# EAGLE board 12003-ZX_Gesture_Sensor_SMD-panel-.v10 (EAGLE 7.5.0), part 1 of 5
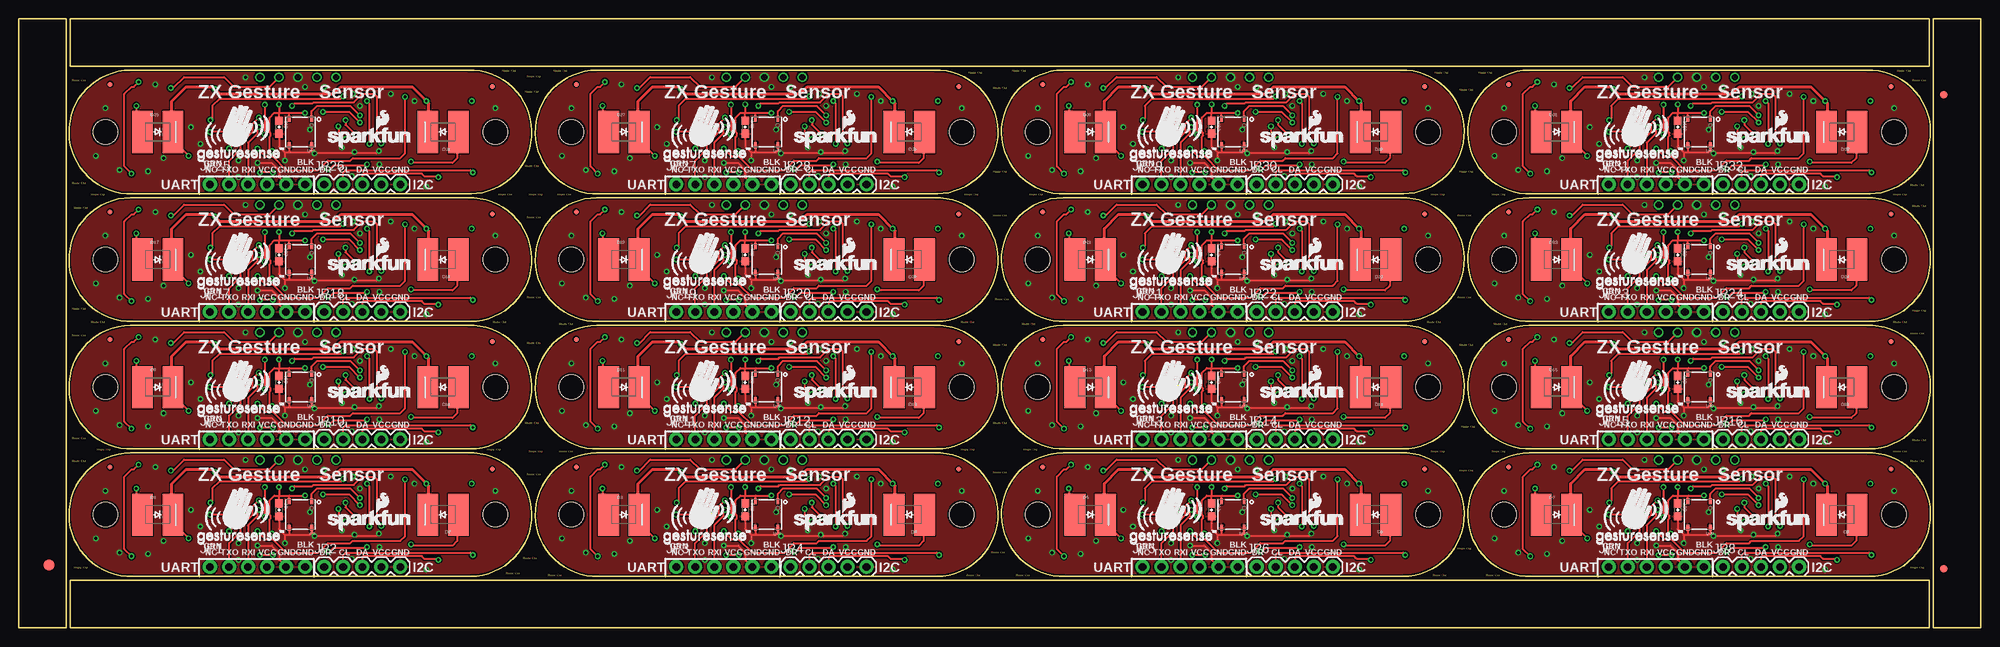
[diagram p0: board, top side]
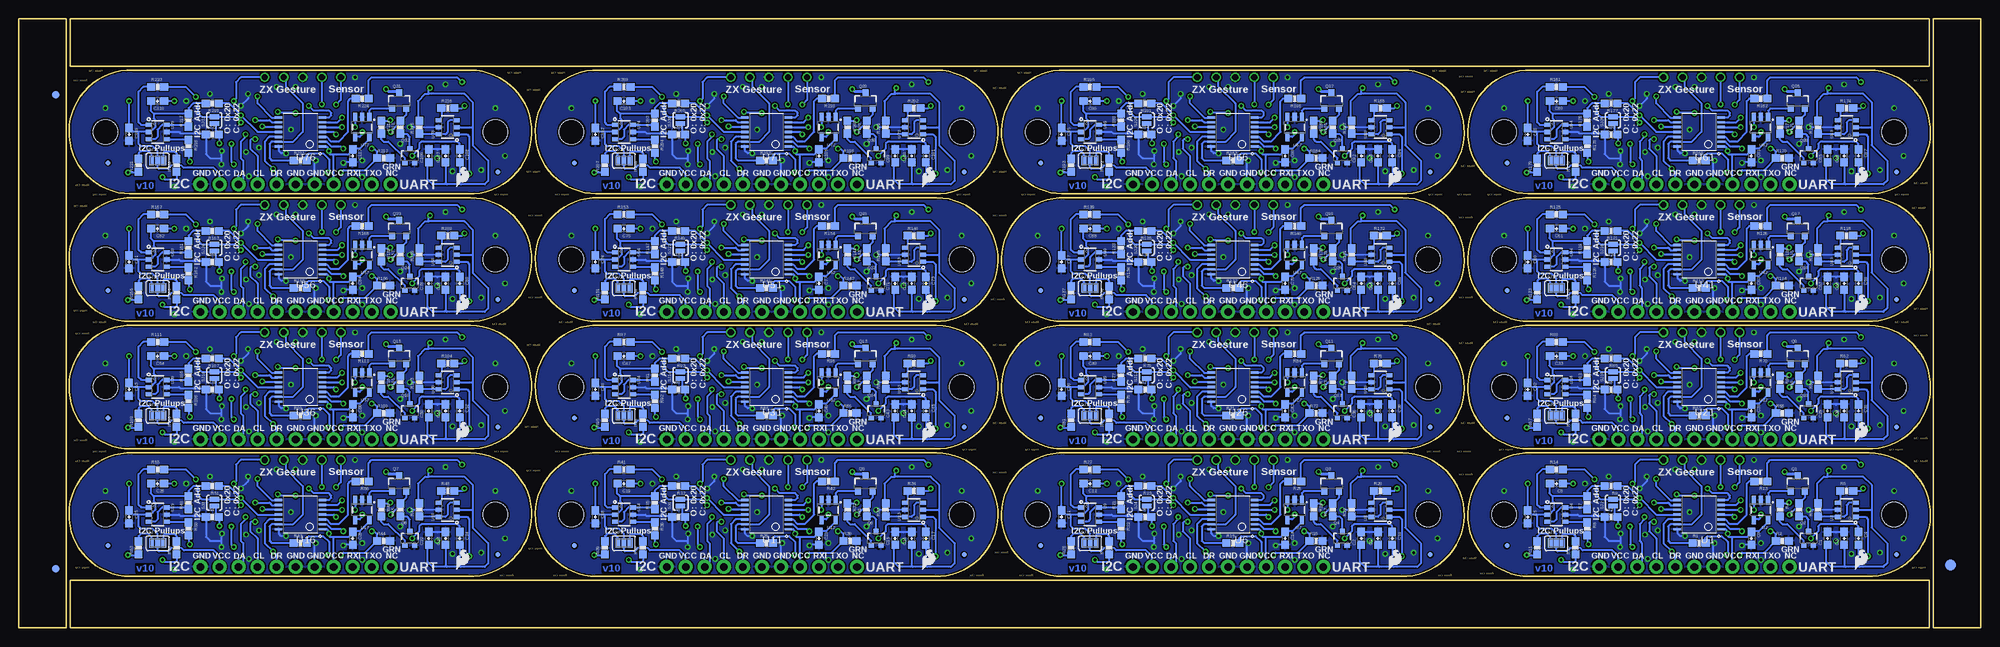
[diagram p1: board, bottom side, seen from below]

Size 261.87 x 81.28 mm. Coordinates in mm from the lower left corner, seen from the top.
Outline: 60.29,6.86 15.21,6.86 arc-181 14.89,23.37 59.98,23.37 arc-181 60.29,6.86
Outline: 60.29,6.86 60.45,6.86
Outline: 122.52,6.86 77.44,6.86 arc-181 77.12,23.37 122.21,23.37 arc-181 122.52,6.86
Outline: 122.52,6.86 122.68,6.86
Outline: 184.75,6.86 139.67,6.86 arc-181 139.35,23.37 184.44,23.37 arc-181 184.75,6.86
Outline: 184.75,6.86 184.91,6.86
Outline: 246.98,6.86 201.9,6.86 arc-181 201.58,23.37 246.67,23.37 arc-181 246.98,6.86
Outline: 246.98,6.86 247.14,6.86
Outline: 60.29,23.88 15.21,23.88 arc-181 14.89,40.39 59.98,40.39 arc-181 60.29,23.88
Outline: 60.29,23.88 60.45,23.88
Outline: 122.52,23.88 77.44,23.88 arc-181 77.12,40.39 122.21,40.39 arc-181 122.52,23.88
Outline: 122.52,23.88 122.68,23.88
Outline: 184.75,23.88 139.67,23.88 arc-181 139.35,40.39 184.44,40.39 arc-181 184.75,23.88
Outline: 184.75,23.88 184.91,23.88
Outline: 246.98,23.88 201.9,23.88 arc-181 201.58,40.39 246.67,40.39 arc-181 246.98,23.88
Outline: 246.98,23.88 247.14,23.88
Outline: 60.29,40.89 15.21,40.89 arc-181 14.89,57.4 59.98,57.4 arc-181 60.29,40.89
Outline: 60.29,40.89 60.45,40.89
Outline: 122.52,40.89 77.44,40.89 arc-181 77.12,57.4 122.21,57.4 arc-181 122.52,40.89
Outline: 122.52,40.89 122.68,40.89
Outline: 184.75,40.89 139.67,40.89 arc-181 139.35,57.4 184.44,57.4 arc-181 184.75,40.89
Outline: 184.75,40.89 184.91,40.89
Outline: 246.98,40.89 201.9,40.89 arc-181 201.58,57.4 246.67,57.4 arc-181 246.98,40.89
Outline: 246.98,40.89 247.14,40.89
Outline: 60.29,57.91 15.21,57.91 arc-181 14.89,74.42 59.98,74.42 arc-181 60.29,57.91
Outline: 60.29,57.91 60.45,57.91
Outline: 122.52,57.91 77.44,57.91 arc-181 77.12,74.42 122.21,74.42 arc-181 122.52,57.91
Outline: 122.52,57.91 122.68,57.91
Outline: 184.75,57.91 139.67,57.91 arc-181 139.35,74.42 184.44,74.42 arc-181 184.75,57.91
Outline: 184.75,57.91 184.91,57.91
Outline: 246.98,57.91 201.9,57.91 arc-181 201.58,74.42 246.67,74.42 arc-181 246.98,57.91
Outline: 246.98,57.91 247.14,57.91
Outline: 0,29.72 0,0 6.35,0 6.35,81.28 0,81.28 0,27.18
Outline: 79.25,0 6.86,0 6.86,6.35 29.72,6.35
Outline: 27.18,6.35 255.02,6.35 255.02,0 76.71,0
Outline: 182.37,81.28 255.02,81.28 255.02,74.93 231.9,74.93
Outline: 234.44,74.93 6.86,74.93 6.86,81.28 184.91,81.28
Outline: 261.87,52.32 261.87,81.28 255.52,81.28 255.52,0 261.87,0 261.87,54.86
Copper layers (1*16): Top 0.035mm / dielectric 1.5mm / Bottom 0.035mm
Design rules "SparkFun-2-layer-TIGHT": minimum track width 7mil, minimum drill 15mil, track to track 7mil, track to pad 7mil, pad to pad 7mil, via to via 7mil, smd to smd 7mil, copper to edge 7mil, drill to drill 7mil, minimum pad ring 7mil, minimum via ring 7mil, stop-mask expansion 4mil, vias tented up to drill 20mil, thermal gap 10mil

## Footprints (pad centres in the part's own frame; a part is rotated, then mirrored left to right if it is on the bottom)
0603-CAP = smd 1.1 x 1: 1 -0.85,0; 2 0.85,0
SFH4641-SHORT2 = smd 5.62 x 2.77: A 0,-2.035; C 0,2.035
FIDUCIAL-1.5X3 = smd 1.5 x 1.5: 1 0,0
FIDUCIAL-1X2 = smd 1 x 1: 1 0,0
MICRO-FIDUCIAL = smd 0.635 x 0.635: 1 0,0
1X06_NO_SILK = drill 1.016 pad 1.88: 1 0,0; 2 2.54,0; 3 5.08,0; 4 7.62,0; 5 10.16,0; 6 12.7,0
1X05 = drill 1.016 pad 1.88: 1 0,0; 2 2.54,0; 3 5.08,0; 4 7.62,0; 5 10.16,0
SOT23-3 = smd 0.8 x 0.9: 1 -0.95,-1; 2 0.95,-1; 3 0,1.1
SOT323 = smd 0.7 x 0.7: 1 -0.65,-0.925; 2 0.65,-0.925; 3 0,0.925
0603-RES = smd 1.1 x 1: 1 -0.85,0; 2 0.85,0
PAD-JUMPER-3-NC_BY_PASTE_YES_SILK_FULL_BOX = smd 0.635 x 1.27: 1 -0.813,0; 2 0,0; 3 0.813,0
PAD-JUMPER-2-NO_YES_SILK = smd 0.635 x 1.27: 1 -0.45,0; 2 0.45,0
STAND-OFF = hole 3.302: 0,0
PAD.03X.04 = smd 1.016 x 1.016: P$1 0,0
TSSOP14 = smd 0.305 x 0.991: 1 -1.95,-2.918; 2 -1.3,-2.918; 3 -0.65,-2.918; 4 0,-2.918; 5 0.65,-2.918; 6 1.3,-2.918; 7 1.95,-2.918; 8 1.95,2.918; 9 1.3,2.918; 10 0.65,2.918; 11 0,2.918; 12 -0.65,2.918; 13 -1.3,2.918; 14 -1.95,2.918
SOT23-5 = smd 0.55 x 1.2: 1 -0.95,-1.3; 2 0,-1.3; 3 0.95,-1.3; 4 0.95,1.3; 5 -0.95,1.3
SOT26 = smd 0.55 x 0.8: D1 -0.95,1.2; D2 0.95,1.2; G1 -0.95,-1.2; G2 0.95,-1.2; S1 0,1.2; S2 0,-1.2
TSOP572 = smd 0.35 x 0.8: 1 -1.5,-1.775; 5 1.5,-1.775; 6 1.5,1.775; 8 -1.5,1.775

## Placement (x,y rotation side)
C1  0.1uF  [0603-CAP]  20.45,11.94 90 bottom
C2  0.1uF  [0603-CAP]  82.68,11.94 90 bottom
C3  0.1uF  [0603-CAP]  18.22,11.94 90 bottom
C4  10nF  [0603-CAP]  16.32,11.94 270 bottom
C5  0.1uF  [0603-CAP]  60.45,14.8 270 bottom
C6  10nF  [0603-CAP]  56.64,19.24 180 bottom
C7  4.7uF  [0603-CAP]  34.73,15.75 270 top
C8  0.1uF  [0603-CAP]  30.61,11.94 270 bottom
C9  0.1uF  [0603-CAP]  80.45,11.94 90 bottom
C10  10nF  [0603-CAP]  78.55,11.94 270 bottom
C11  0.1uF  [0603-CAP]  122.68,14.8 270 bottom
C12  10nF  [0603-CAP]  118.87,19.24 180 bottom
C13  4.7uF  [0603-CAP]  96.96,15.75 270 top
C14  0.1uF  [0603-CAP]  92.84,11.94 270 bottom
C15  0.1uF  [0603-CAP]  144.91,11.94 90 bottom
C16  0.1uF  [0603-CAP]  142.68,11.94 90 bottom
C17  10nF  [0603-CAP]  140.78,11.94 270 bottom
C18  0.1uF  [0603-CAP]  184.91,14.8 270 bottom
C19  10nF  [0603-CAP]  181.1,19.24 180 bottom
C20  4.7uF  [0603-CAP]  159.19,15.75 270 top
C21  0.1uF  [0603-CAP]  155.07,11.94 270 bottom
C22  0.1uF  [0603-CAP]  207.14,11.94 90 bottom
C23  0.1uF  [0603-CAP]  204.91,11.94 90 bottom
C24  10nF  [0603-CAP]  203.01,11.94 270 bottom
C25  0.1uF  [0603-CAP]  247.14,14.8 270 bottom
C26  10nF  [0603-CAP]  243.33,19.24 180 bottom
C27  4.7uF  [0603-CAP]  221.42,15.75 270 top
C28  0.1uF  [0603-CAP]  217.3,11.94 270 bottom
C29  0.1uF  [0603-CAP]  20.45,28.96 90 bottom
C30  0.1uF  [0603-CAP]  18.22,28.96 90 bottom
C31  10nF  [0603-CAP]  16.32,28.96 270 bottom
C32  0.1uF  [0603-CAP]  60.45,31.81 270 bottom
C33  10nF  [0603-CAP]  56.64,36.26 180 bottom
C34  4.7uF  [0603-CAP]  34.73,32.77 270 top
C35  0.1uF  [0603-CAP]  30.61,28.96 270 bottom
C36  0.1uF  [0603-CAP]  82.68,28.96 90 bottom
C37  0.1uF  [0603-CAP]  80.45,28.96 90 bottom
C38  10nF  [0603-CAP]  78.55,28.96 270 bottom
C39  0.1uF  [0603-CAP]  122.68,31.81 270 bottom
C40  10nF  [0603-CAP]  118.87,36.26 180 bottom
C41  4.7uF  [0603-CAP]  96.96,32.77 270 top
C42  0.1uF  [0603-CAP]  92.84,28.96 270 bottom
C43  0.1uF  [0603-CAP]  144.91,28.96 90 bottom
C44  0.1uF  [0603-CAP]  142.68,28.96 90 bottom
C45  10nF  [0603-CAP]  140.78,28.96 270 bottom
C46  0.1uF  [0603-CAP]  184.91,31.81 270 bottom
C47  10nF  [0603-CAP]  181.1,36.26 180 bottom
C48  4.7uF  [0603-CAP]  159.19,32.77 270 top
C49  0.1uF  [0603-CAP]  155.07,28.96 270 bottom
C50  0.1uF  [0603-CAP]  207.14,28.96 90 bottom
C51  0.1uF  [0603-CAP]  204.91,28.96 90 bottom
C52  10nF  [0603-CAP]  203.01,28.96 270 bottom
C53  0.1uF  [0603-CAP]  247.14,31.81 270 bottom
C54  10nF  [0603-CAP]  243.33,36.26 180 bottom
C55  4.7uF  [0603-CAP]  221.42,32.77 270 top
C56  0.1uF  [0603-CAP]  217.3,28.96 270 bottom
C57  0.1uF  [0603-CAP]  20.45,45.97 90 bottom
C58  0.1uF  [0603-CAP]  18.22,45.97 90 bottom
C59  10nF  [0603-CAP]  16.32,45.97 270 bottom
C60  0.1uF  [0603-CAP]  60.45,48.83 270 bottom
C61  10nF  [0603-CAP]  56.64,53.28 180 bottom
C62  4.7uF  [0603-CAP]  34.73,49.78 270 top
C63  0.1uF  [0603-CAP]  30.61,45.97 270 bottom
C64  0.1uF  [0603-CAP]  82.68,45.97 90 bottom
C65  0.1uF  [0603-CAP]  80.45,45.97 90 bottom
C66  10nF  [0603-CAP]  78.55,45.97 270 bottom
C67  0.1uF  [0603-CAP]  122.68,48.83 270 bottom
C68  10nF  [0603-CAP]  118.87,53.28 180 bottom
C69  4.7uF  [0603-CAP]  96.96,49.78 270 top
C70  0.1uF  [0603-CAP]  92.84,45.97 270 bottom
C71  0.1uF  [0603-CAP]  144.91,45.97 90 bottom
C72  0.1uF  [0603-CAP]  142.68,45.97 90 bottom
C73  10nF  [0603-CAP]  140.78,45.97 270 bottom
C74  0.1uF  [0603-CAP]  184.91,48.83 270 bottom
C75  10nF  [0603-CAP]  181.1,53.28 180 bottom
C76  4.7uF  [0603-CAP]  159.19,49.78 270 top
C77  0.1uF  [0603-CAP]  155.07,45.97 270 bottom
C78  0.1uF  [0603-CAP]  207.14,45.97 90 bottom
C79  0.1uF  [0603-CAP]  204.91,45.97 90 bottom
C80  10nF  [0603-CAP]  203.01,45.97 270 bottom
C81  0.1uF  [0603-CAP]  247.14,48.83 270 bottom
C82  10nF  [0603-CAP]  243.33,53.28 180 bottom
C83  4.7uF  [0603-CAP]  221.42,49.78 270 top
C84  0.1uF  [0603-CAP]  217.3,45.97 270 bottom
C85  0.1uF  [0603-CAP]  20.45,62.99 90 bottom
C86  0.1uF  [0603-CAP]  18.22,62.99 90 bottom
C87  10nF  [0603-CAP]  16.32,62.99 270 bottom
C88  0.1uF  [0603-CAP]  60.45,65.85 270 bottom
C89  10nF  [0603-CAP]  56.64,70.29 180 bottom
C90  4.7uF  [0603-CAP]  34.73,66.8 270 top
C91  0.1uF  [0603-CAP]  30.61,62.99 270 bottom
C92  0.1uF  [0603-CAP]  82.68,62.99 90 bottom
C93  0.1uF  [0603-CAP]  80.45,62.99 90 bottom
C94  10nF  [0603-CAP]  78.55,62.99 270 bottom
C95  0.1uF  [0603-CAP]  122.68,65.85 270 bottom
C96  10nF  [0603-CAP]  118.87,70.29 180 bottom
C97  4.7uF  [0603-CAP]  96.96,66.8 270 top
C98  0.1uF  [0603-CAP]  92.84,62.99 270 bottom
C99  0.1uF  [0603-CAP]  144.91,62.99 90 bottom
C100  0.1uF  [0603-CAP]  142.68,62.99 90 bottom
C101  10nF  [0603-CAP]  140.78,62.99 270 bottom
C102  0.1uF  [0603-CAP]  184.91,65.85 270 bottom
C103  10nF  [0603-CAP]  181.1,70.29 180 bottom
C104  4.7uF  [0603-CAP]  159.19,66.8 270 top
C105  0.1uF  [0603-CAP]  155.07,62.99 270 bottom
C106  0.1uF  [0603-CAP]  207.14,62.99 90 bottom
C107  0.1uF  [0603-CAP]  204.91,62.99 90 bottom
C108  10nF  [0603-CAP]  203.01,62.99 270 bottom
C109  0.1uF  [0603-CAP]  247.14,65.85 270 bottom
C110  10nF  [0603-CAP]  243.33,70.29 180 bottom
C111  4.7uF  [0603-CAP]  221.42,66.8 270 top
C112  0.1uF  [0603-CAP]  217.3,62.99 270 bottom
D1  SFH4641SHORT2  [SFH4641-SHORT2]  18.54,15.11 270 top
D2  SFH4641SHORT2  [SFH4641-SHORT2]  56.64,15.11 90 top
D3  SFH4641SHORT2  [SFH4641-SHORT2]  80.77,15.11 270 top
D4  SFH4641SHORT2  [SFH4641-SHORT2]  118.87,15.11 90 top
D5  SFH4641SHORT2  [SFH4641-SHORT2]  143,15.11 270 top
D6  SFH4641SHORT2  [SFH4641-SHORT2]  181.1,15.11 90 top
D7  SFH4641SHORT2  [SFH4641-SHORT2]  205.23,15.11 270 top
D8  SFH4641SHORT2  [SFH4641-SHORT2]  243.33,15.11 90 top
D9  SFH4641SHORT2  [SFH4641-SHORT2]  18.54,32.13 270 top
D10  SFH4641SHORT2  [SFH4641-SHORT2]  56.64,32.13 90 top
D11  SFH4641SHORT2  [SFH4641-SHORT2]  80.77,32.13 270 top
D12  SFH4641SHORT2  [SFH4641-SHORT2]  118.87,32.13 90 top
D13  SFH4641SHORT2  [SFH4641-SHORT2]  143,32.13 270 top
D14  SFH4641SHORT2  [SFH4641-SHORT2]  181.1,32.13 90 top
D15  SFH4641SHORT2  [SFH4641-SHORT2]  205.23,32.13 270 top
D16  SFH4641SHORT2  [SFH4641-SHORT2]  243.33,32.13 90 top
D17  SFH4641SHORT2  [SFH4641-SHORT2]  18.54,49.15 270 top
D18  SFH4641SHORT2  [SFH4641-SHORT2]  56.64,49.15 90 top
D19  SFH4641SHORT2  [SFH4641-SHORT2]  80.77,49.15 270 top
D20  SFH4641SHORT2  [SFH4641-SHORT2]  118.87,49.15 90 top
D21  SFH4641SHORT2  [SFH4641-SHORT2]  143,49.15 270 top
D22  SFH4641SHORT2  [SFH4641-SHORT2]  181.1,49.15 90 top
D23  SFH4641SHORT2  [SFH4641-SHORT2]  205.23,49.15 270 top
D24  SFH4641SHORT2  [SFH4641-SHORT2]  243.33,49.15 90 top
D25  SFH4641SHORT2  [SFH4641-SHORT2]  18.54,66.17 270 top
D26  SFH4641SHORT2  [SFH4641-SHORT2]  56.64,66.17 90 top
D27  SFH4641SHORT2  [SFH4641-SHORT2]  80.77,66.17 270 top
D28  SFH4641SHORT2  [SFH4641-SHORT2]  118.87,66.17 90 top
D29  SFH4641SHORT2  [SFH4641-SHORT2]  143,66.17 270 top
D30  SFH4641SHORT2  [SFH4641-SHORT2]  181.1,66.17 90 top
D31  SFH4641SHORT2  [SFH4641-SHORT2]  205.23,66.17 270 top
D32  SFH4641SHORT2  [SFH4641-SHORT2]  243.33,66.17 90 top
E$1  [FIDUCIAL-1.5X3]  4.06,8.38 0 top
E$2  [FIDUCIAL-1.5X3]  4.06,8.38 90 bottom
E$3  [FIDUCIAL-1X2]  256.92,7.87 0 bottom
E$4  [FIDUCIAL-1X2]  256.92,71.12 0 bottom
E$7  [FIDUCIAL-1X2]  256.92,71.12 180 top
E$8  [FIDUCIAL-1X2]  256.92,7.87 0 top
FID1  FIDUCIALUFIDUCIAL  [MICRO-FIDUCIAL]  11.24,9.78 0 bottom
FID2  FIDUCIALUFIDUCIAL  [MICRO-FIDUCIAL]  63.25,10.99 0 bottom
FID3  FIDUCIALUFIDUCIAL  [MICRO-FIDUCIAL]  12.19,21.46 0 top
FID4  FIDUCIALUFIDUCIAL  [MICRO-FIDUCIAL]  63.21,21.18 0 top
FID5  FIDUCIALUFIDUCIAL  [MICRO-FIDUCIAL]  73.47,9.78 0 bottom
FID6  FIDUCIALUFIDUCIAL  [MICRO-FIDUCIAL]  125.48,10.99 0 bottom
FID7  FIDUCIALUFIDUCIAL  [MICRO-FIDUCIAL]  125.44,21.18 0 top
FID8  FIDUCIALUFIDUCIAL  [MICRO-FIDUCIAL]  74.42,21.46 0 top
FID9  FIDUCIALUFIDUCIAL  [MICRO-FIDUCIAL]  135.7,9.78 0 bottom
FID10  FIDUCIALUFIDUCIAL  [MICRO-FIDUCIAL]  187.71,10.99 0 bottom
FID11  FIDUCIALUFIDUCIAL  [MICRO-FIDUCIAL]  187.67,21.18 0 top
FID12  FIDUCIALUFIDUCIAL  [MICRO-FIDUCIAL]  136.65,21.46 0 top
FID13  FIDUCIALUFIDUCIAL  [MICRO-FIDUCIAL]  197.93,9.78 0 bottom
FID14  FIDUCIALUFIDUCIAL  [MICRO-FIDUCIAL]  249.94,10.99 0 bottom
FID15  FIDUCIALUFIDUCIAL  [MICRO-FIDUCIAL]  249.9,21.18 0 top
FID16  FIDUCIALUFIDUCIAL  [MICRO-FIDUCIAL]  198.88,21.46 0 top
FID17  FIDUCIALUFIDUCIAL  [MICRO-FIDUCIAL]  11.24,26.8 0 bottom
FID18  FIDUCIALUFIDUCIAL  [MICRO-FIDUCIAL]  63.25,28 0 bottom
FID19  FIDUCIALUFIDUCIAL  [MICRO-FIDUCIAL]  63.21,38.2 0 top
FID20  FIDUCIALUFIDUCIAL  [MICRO-FIDUCIAL]  12.19,38.48 0 top
FID21  FIDUCIALUFIDUCIAL  [MICRO-FIDUCIAL]  73.47,26.8 0 bottom
FID22  FIDUCIALUFIDUCIAL  [MICRO-FIDUCIAL]  125.48,28 0 bottom
FID23  FIDUCIALUFIDUCIAL  [MICRO-FIDUCIAL]  125.44,38.2 0 top
FID24  FIDUCIALUFIDUCIAL  [MICRO-FIDUCIAL]  74.42,38.48 0 top
FID25  FIDUCIALUFIDUCIAL  [MICRO-FIDUCIAL]  135.7,26.8 0 bottom
FID26  FIDUCIALUFIDUCIAL  [MICRO-FIDUCIAL]  187.71,28 0 bottom
FID27  FIDUCIALUFIDUCIAL  [MICRO-FIDUCIAL]  187.67,38.2 0 top
FID28  FIDUCIALUFIDUCIAL  [MICRO-FIDUCIAL]  136.65,38.48 0 top
FID29  FIDUCIALUFIDUCIAL  [MICRO-FIDUCIAL]  197.93,26.8 0 bottom
FID30  FIDUCIALUFIDUCIAL  [MICRO-FIDUCIAL]  249.94,28 0 bottom
FID31  FIDUCIALUFIDUCIAL  [MICRO-FIDUCIAL]  249.9,38.2 0 top
FID32  FIDUCIALUFIDUCIAL  [MICRO-FIDUCIAL]  198.88,38.48 0 top
FID33  FIDUCIALUFIDUCIAL  [MICRO-FIDUCIAL]  11.24,43.81 0 bottom
FID34  FIDUCIALUFIDUCIAL  [MICRO-FIDUCIAL]  63.25,45.02 0 bottom
FID35  FIDUCIALUFIDUCIAL  [MICRO-FIDUCIAL]  63.21,55.21 0 top
FID36  FIDUCIALUFIDUCIAL  [MICRO-FIDUCIAL]  12.19,55.5 0 top
FID37  FIDUCIALUFIDUCIAL  [MICRO-FIDUCIAL]  73.47,43.81 0 bottom
FID38  FIDUCIALUFIDUCIAL  [MICRO-FIDUCIAL]  125.48,45.02 0 bottom
FID39  FIDUCIALUFIDUCIAL  [MICRO-FIDUCIAL]  125.44,55.21 0 top
FID40  FIDUCIALUFIDUCIAL  [MICRO-FIDUCIAL]  74.42,55.5 0 top
FID41  FIDUCIALUFIDUCIAL  [MICRO-FIDUCIAL]  135.7,43.81 0 bottom
FID42  FIDUCIALUFIDUCIAL  [MICRO-FIDUCIAL]  187.71,45.02 0 bottom
FID43  FIDUCIALUFIDUCIAL  [MICRO-FIDUCIAL]  187.67,55.21 0 top
FID44  FIDUCIALUFIDUCIAL  [MICRO-FIDUCIAL]  136.65,55.5 0 top
FID45  FIDUCIALUFIDUCIAL  [MICRO-FIDUCIAL]  197.93,43.81 0 bottom
FID46  FIDUCIALUFIDUCIAL  [MICRO-FIDUCIAL]  249.94,45.02 0 bottom
FID47  FIDUCIALUFIDUCIAL  [MICRO-FIDUCIAL]  249.9,55.21 0 top
FID48  FIDUCIALUFIDUCIAL  [MICRO-FIDUCIAL]  198.88,55.5 0 top
FID49  FIDUCIALUFIDUCIAL  [MICRO-FIDUCIAL]  11.24,60.83 0 bottom
FID50  FIDUCIALUFIDUCIAL  [MICRO-FIDUCIAL]  63.25,62.04 0 bottom
FID51  FIDUCIALUFIDUCIAL  [MICRO-FIDUCIAL]  63.21,72.23 0 top
FID52  FIDUCIALUFIDUCIAL  [MICRO-FIDUCIAL]  12.19,72.52 0 top
FID53  FIDUCIALUFIDUCIAL  [MICRO-FIDUCIAL]  73.47,60.83 0 bottom
FID54  FIDUCIALUFIDUCIAL  [MICRO-FIDUCIAL]  125.48,62.04 0 bottom
FID55  FIDUCIALUFIDUCIAL  [MICRO-FIDUCIAL]  125.44,72.23 0 top
FID56  FIDUCIALUFIDUCIAL  [MICRO-FIDUCIAL]  74.42,72.52 0 top
FID57  FIDUCIALUFIDUCIAL  [MICRO-FIDUCIAL]  135.7,60.83 0 bottom
FID58  FIDUCIALUFIDUCIAL  [MICRO-FIDUCIAL]  187.71,62.04 0 bottom
FID59  FIDUCIALUFIDUCIAL  [MICRO-FIDUCIAL]  187.67,72.23 0 top
FID60  FIDUCIALUFIDUCIAL  [MICRO-FIDUCIAL]  136.65,72.52 0 top
FID61  FIDUCIALUFIDUCIAL  [MICRO-FIDUCIAL]  197.93,60.83 0 bottom
FID62  FIDUCIALUFIDUCIAL  [MICRO-FIDUCIAL]  249.94,62.04 0 bottom
FID63  FIDUCIALUFIDUCIAL  [MICRO-FIDUCIAL]  249.9,72.23 0 top
FID64  FIDUCIALUFIDUCIAL  [MICRO-FIDUCIAL]  198.88,72.52 0 top
JP1  [1X06_NO_SILK]  25.53,8.13 0 top
JP2  [1X05]  40.77,8.13 0 top
JP3  [1X06_NO_SILK]  87.76,8.13 0 top
JP4  [1X05]  103,8.13 0 top
JP5  [1X06_NO_SILK]  149.99,8.13 0 top
JP6  [1X05]  165.23,8.13 0 top
JP7  [1X06_NO_SILK]  212.22,8.13 0 top
JP8  [1X05]  227.46,8.13 0 top
JP9  [1X06_NO_SILK]  25.53,25.15 0 top
JP10  [1X05]  40.77,25.15 0 top
JP11  [1X06_NO_SILK]  87.76,25.15 0 top
JP12  [1X05]  103,25.15 0 top
JP13  [1X06_NO_SILK]  149.99,25.15 0 top
JP14  [1X05]  165.23,25.15 0 top
JP15  [1X06_NO_SILK]  212.22,25.15 0 top
JP16  [1X05]  227.46,25.15 0 top
JP17  [1X06_NO_SILK]  25.53,42.16 0 top
JP18  [1X05]  40.77,42.16 0 top
JP19  [1X06_NO_SILK]  87.76,42.16 0 top
JP20  [1X05]  103,42.16 0 top
JP21  [1X06_NO_SILK]  149.99,42.16 0 top
JP22  [1X05]  165.23,42.16 0 top
JP23  [1X06_NO_SILK]  212.22,42.16 0 top
JP24  [1X05]  227.46,42.16 0 top
JP25  [1X06_NO_SILK]  25.53,59.18 0 top
JP26  [1X05]  40.77,59.18 0 top
JP27  [1X06_NO_SILK]  87.76,59.18 0 top
JP28  [1X05]  103,59.18 0 top
JP29  [1X06_NO_SILK]  149.99,59.18 0 top
JP30  [1X05]  165.23,59.18 0 top
JP31  [1X06_NO_SILK]  212.22,59.18 0 top
JP32  [1X05]  227.46,59.18 0 top
LOGO1  SFE_LOGO_FLAME.1_INCH  [SFE_LOGO_FLAME_.1]  79.31,7.47 0 bottom
LOGO2  SFE_LOGO_FLAME.1_INCH  [SFE_LOGO_FLAME_.1]  17.08,7.47 0 bottom
LOGO3  SFE_LOGO_FLAME.1_INCH  [SFE_LOGO_FLAME_.1]  141.54,7.47 0 bottom
LOGO4  SFE_LOGO_FLAME.1_INCH  [SFE_LOGO_FLAME_.1]  203.77,7.47 0 bottom
LOGO5  SFE_LOGO_FLAME.1_INCH  [SFE_LOGO_FLAME_.1]  17.08,24.49 0 bottom
LOGO6  SFE_LOGO_FLAME.1_INCH  [SFE_LOGO_FLAME_.1]  79.31,24.49 0 bottom
LOGO7  SFE_LOGO_FLAME.1_INCH  [SFE_LOGO_FLAME_.1]  141.54,24.49 0 bottom
LOGO8  SFE_LOGO_FLAME.1_INCH  [SFE_LOGO_FLAME_.1]  203.77,24.49 0 bottom
LOGO9  SFE_LOGO_FLAME.1_INCH  [SFE_LOGO_FLAME_.1]  17.08,41.5 0 bottom
LOGO10  SFE_LOGO_FLAME.1_INCH  [SFE_LOGO_FLAME_.1]  79.31,41.5 0 bottom
LOGO11  SFE_LOGO_FLAME.1_INCH  [SFE_LOGO_FLAME_.1]  141.54,41.5 0 bottom
LOGO12  SFE_LOGO_FLAME.1_INCH  [SFE_LOGO_FLAME_.1]  203.77,41.5 0 bottom
LOGO13  SFE_LOGO_FLAME.1_INCH  [SFE_LOGO_FLAME_.1]  17.08,58.52 0 bottom
LOGO14  SFE_LOGO_FLAME.1_INCH  [SFE_LOGO_FLAME_.1]  79.31,58.52 0 bottom
LOGO15  SFE_LOGO_FLAME.1_INCH  [SFE_LOGO_FLAME_.1]  141.54,58.52 0 bottom
LOGO16  SFE_LOGO_FLAME.1_INCH  [SFE_LOGO_FLAME_.1]  203.77,58.52 0 bottom
Q1  MMBT2222A  [SOT23-3]  24.42,19.24 0 bottom
Q2  MOSFET-NCHANNEL2N7002PW  [SOT323]  22.99,11.94 0 bottom
Q3  MMBT2222A  [SOT23-3]  86.65,19.24 0 bottom
Q4  MOSFET-NCHANNEL2N7002PW  [SOT323]  85.22,11.94 0 bottom
Q5  MMBT2222A  [SOT23-3]  148.88,19.24 0 bottom
Q6  MOSFET-NCHANNEL2N7002PW  [SOT323]  147.45,11.94 0 bottom
Q7  MMBT2222A  [SOT23-3]  211.11,19.24 0 bottom
Q8  MOSFET-NCHANNEL2N7002PW  [SOT323]  209.68,11.94 0 bottom
Q9  MMBT2222A  [SOT23-3]  24.42,36.26 0 bottom
Q10  MOSFET-NCHANNEL2N7002PW  [SOT323]  22.99,28.96 0 bottom
Q11  MMBT2222A  [SOT23-3]  86.65,36.26 0 bottom
Q12  MOSFET-NCHANNEL2N7002PW  [SOT323]  85.22,28.96 0 bottom
Q13  MMBT2222A  [SOT23-3]  148.88,36.26 0 bottom
Q14  MOSFET-NCHANNEL2N7002PW  [SOT323]  147.45,28.96 0 bottom
Q15  MMBT2222A  [SOT23-3]  211.11,36.26 0 bottom
Q16  MOSFET-NCHANNEL2N7002PW  [SOT323]  209.68,28.96 0 bottom
Q17  MMBT2222A  [SOT23-3]  24.42,53.28 0 bottom
Q18  MOSFET-NCHANNEL2N7002PW  [SOT323]  22.99,45.97 0 bottom
Q19  MMBT2222A  [SOT23-3]  86.65,53.28 0 bottom
Q20  MOSFET-NCHANNEL2N7002PW  [SOT323]  85.22,45.97 0 bottom
Q21  MMBT2222A  [SOT23-3]  148.88,53.28 0 bottom
Q22  MOSFET-NCHANNEL2N7002PW  [SOT323]  147.45,45.97 0 bottom
Q23  MMBT2222A  [SOT23-3]  211.11,53.28 0 bottom
Q24  MOSFET-NCHANNEL2N7002PW  [SOT323]  209.68,45.97 0 bottom
Q25  MMBT2222A  [SOT23-3]  24.42,70.29 0 bottom
Q26  MOSFET-NCHANNEL2N7002PW  [SOT323]  22.99,62.99 0 bottom
Q27  MMBT2222A  [SOT23-3]  86.65,70.29 0 bottom
Q28  MOSFET-NCHANNEL2N7002PW  [SOT323]  85.22,62.99 0 bottom
Q29  MMBT2222A  [SOT23-3]  148.88,70.29 0 bottom
Q30  MOSFET-NCHANNEL2N7002PW  [SOT323]  147.45,62.99 0 bottom
Q31  MMBT2222A  [SOT23-3]  211.11,70.29 0 bottom
Q32  MOSFET-NCHANNEL2N7002PW  [SOT323]  209.68,62.99 0 bottom
R1  100k  [0603-RES]  37.59,11.3 0 bottom
R2  100k  [0603-RES]  26.48,11.62 0 bottom
R3  1K 1%  [0603-RES]  24.26,15.75 90 bottom
R4  1K  [0603-RES]  26.8,15.75 270 bottom
R5  100k  [0603-RES]  21.72,15.75 90 bottom
R6  1  [0603-RES]  17.91,18.29 0 bottom
R7  100k  [0603-RES]  52.51,16.7 90 bottom
R8  1  [0603-RES]  52.51,13.21 270 bottom
R9  1K  [0603-RES]  49.34,18.92 180 bottom
R10  4.7K  [0603-RES]  54.1,10.67 90 bottom
R11  4.7K  [0603-RES]  59.18,10.67 90 bottom
R12  10K  [0603-RES]  49.34,14.8 0 bottom
R13  1K  [0603-RES]  29.34,19.56 180 bottom
R14  1K  [0603-RES]  56.64,21.15 0 bottom
R15  100k  [0603-RES]  99.82,11.3 0 bottom
R16  100k  [0603-RES]  88.71,11.62 0 bottom
R17  1K 1%  [0603-RES]  86.49,15.75 90 bottom
R18  1K  [0603-RES]  89.03,15.75 270 bottom
R19  100k  [0603-RES]  83.95,15.75 90 bottom
R20  1  [0603-RES]  80.14,18.29 0 bottom
R21  100k  [0603-RES]  114.74,16.7 90 bottom
R22  1  [0603-RES]  114.74,13.21 270 bottom
R23  1K  [0603-RES]  111.57,18.92 180 bottom
R24  4.7K  [0603-RES]  116.33,10.67 90 bottom
R25  4.7K  [0603-RES]  121.41,10.67 90 bottom
R26  10K  [0603-RES]  111.57,14.8 0 bottom
R27  1K  [0603-RES]  118.87,21.15 0 bottom
R28  1K  [0603-RES]  91.57,19.56 180 bottom
R29  100k  [0603-RES]  162.05,11.3 0 bottom
R30  100k  [0603-RES]  150.94,11.62 0 bottom
R31  1K 1%  [0603-RES]  148.72,15.75 90 bottom
R32  1K  [0603-RES]  151.26,15.75 270 bottom
R33  100k  [0603-RES]  146.18,15.75 90 bottom
R34  1  [0603-RES]  142.37,18.29 0 bottom
R35  100k  [0603-RES]  176.97,16.7 90 bottom
R36  1  [0603-RES]  176.97,13.21 270 bottom
R37  1K  [0603-RES]  173.8,18.92 180 bottom
R38  4.7K  [0603-RES]  178.56,10.67 90 bottom
R39  4.7K  [0603-RES]  183.64,10.67 90 bottom
R40  10K  [0603-RES]  173.8,14.8 0 bottom
R41  1K  [0603-RES]  181.1,21.15 0 bottom
R42  1K  [0603-RES]  153.8,19.56 180 bottom
R43  100k  [0603-RES]  224.28,11.3 0 bottom
R44  100k  [0603-RES]  213.17,11.62 0 bottom
R45  1K 1%  [0603-RES]  210.95,15.75 90 bottom
R46  1K  [0603-RES]  213.49,15.75 270 bottom
R47  100k  [0603-RES]  208.41,15.75 90 bottom
R48  1  [0603-RES]  204.6,18.29 0 bottom
R49  100k  [0603-RES]  239.2,16.7 90 bottom
R50  1  [0603-RES]  239.2,13.21 270 bottom
R51  1K  [0603-RES]  236.03,18.92 180 bottom
R52  4.7K  [0603-RES]  240.79,10.67 90 bottom
R53  4.7K  [0603-RES]  245.87,10.67 90 bottom
R54  10K  [0603-RES]  236.03,14.8 0 bottom
R55  1K  [0603-RES]  243.33,21.15 0 bottom
R56  1K  [0603-RES]  216.03,19.56 180 bottom
R57  100k  [0603-RES]  37.59,28.32 0 bottom
R58  100k  [0603-RES]  26.48,28.64 0 bottom
R59  1K 1%  [0603-RES]  24.26,32.77 90 bottom
R60  1K  [0603-RES]  26.8,32.77 270 bottom
R61  100k  [0603-RES]  21.72,32.77 90 bottom
R62  1  [0603-RES]  17.91,35.31 0 bottom
R63  100k  [0603-RES]  52.51,33.72 90 bottom
R64  1  [0603-RES]  52.51,30.23 270 bottom
R65  1K  [0603-RES]  49.34,35.94 180 bottom
R66  4.7K  [0603-RES]  54.1,27.69 90 bottom
R67  4.7K  [0603-RES]  59.18,27.69 90 bottom
R68  10K  [0603-RES]  49.34,31.81 0 bottom
R69  1K  [0603-RES]  56.64,38.16 0 bottom
R70  1K  [0603-RES]  29.34,36.58 180 bottom
R71  100k  [0603-RES]  99.82,28.32 0 bottom
R72  100k  [0603-RES]  88.71,28.64 0 bottom
R73  1K 1%  [0603-RES]  86.49,32.77 90 bottom
R74  1K  [0603-RES]  89.03,32.77 270 bottom
R75  100k  [0603-RES]  83.95,32.77 90 bottom
R76  1  [0603-RES]  80.14,35.31 0 bottom
R77  100k  [0603-RES]  114.74,33.72 90 bottom
R78  1  [0603-RES]  114.74,30.23 270 bottom
R79  1K  [0603-RES]  111.57,35.94 180 bottom
R80  4.7K  [0603-RES]  116.33,27.69 90 bottom
R81  4.7K  [0603-RES]  121.41,27.69 90 bottom
R82  10K  [0603-RES]  111.57,31.81 0 bottom
R83  1K  [0603-RES]  118.87,38.16 0 bottom
R84  1K  [0603-RES]  91.57,36.58 180 bottom
R85  100k  [0603-RES]  162.05,28.32 0 bottom
R86  100k  [0603-RES]  150.94,28.64 0 bottom
R87  1K 1%  [0603-RES]  148.72,32.77 90 bottom
R88  1K  [0603-RES]  151.26,32.77 270 bottom
R89  100k  [0603-RES]  146.18,32.77 90 bottom
R90  1  [0603-RES]  142.37,35.31 0 bottom
R91  100k  [0603-RES]  176.97,33.72 90 bottom
R92  1  [0603-RES]  176.97,30.23 270 bottom
R93  1K  [0603-RES]  173.8,35.94 180 bottom
R94  4.7K  [0603-RES]  178.56,27.69 90 bottom
R95  4.7K  [0603-RES]  183.64,27.69 90 bottom
R96  10K  [0603-RES]  173.8,31.81 0 bottom
R97  1K  [0603-RES]  181.1,38.16 0 bottom
R98  1K  [0603-RES]  153.8,36.58 180 bottom
R99  100k  [0603-RES]  224.28,28.32 0 bottom
R100  100k  [0603-RES]  213.17,28.64 0 bottom
R101  1K 1%  [0603-RES]  210.95,32.77 90 bottom
R102  1K  [0603-RES]  213.49,32.77 270 bottom
R103  100k  [0603-RES]  208.41,32.77 90 bottom
R104  1  [0603-RES]  204.6,35.31 0 bottom
R105  100k  [0603-RES]  239.2,33.72 90 bottom
R106  1  [0603-RES]  239.2,30.23 270 bottom
R107  1K  [0603-RES]  236.03,35.94 180 bottom
R108  4.7K  [0603-RES]  240.79,27.69 90 bottom
R109  4.7K  [0603-RES]  245.87,27.69 90 bottom
R110  10K  [0603-RES]  236.03,31.81 0 bottom
R111  1K  [0603-RES]  243.33,38.16 0 bottom
R112  1K  [0603-RES]  216.03,36.58 180 bottom
R113  100k  [0603-RES]  37.59,45.34 0 bottom
R114  100k  [0603-RES]  26.48,45.66 0 bottom
R115  1K 1%  [0603-RES]  24.26,49.78 90 bottom
R116  1K  [0603-RES]  26.8,49.78 270 bottom
R117  100k  [0603-RES]  21.72,49.78 90 bottom
R118  1  [0603-RES]  17.91,52.32 0 bottom
R119  100k  [0603-RES]  52.51,50.74 90 bottom
R120  1  [0603-RES]  52.51,47.24 270 bottom
R121  1K  [0603-RES]  49.34,52.96 180 bottom
R122  4.7K  [0603-RES]  54.1,44.7 90 bottom
R123  4.7K  [0603-RES]  59.18,44.7 90 bottom
R124  10K  [0603-RES]  49.34,48.83 0 bottom
R125  1K  [0603-RES]  56.64,55.18 0 bottom
R126  1K  [0603-RES]  29.34,53.59 180 bottom
R127  100k  [0603-RES]  99.82,45.34 0 bottom
R128  100k  [0603-RES]  88.71,45.66 0 bottom
R129  1K 1%  [0603-RES]  86.49,49.78 90 bottom
R130  1K  [0603-RES]  89.03,49.78 270 bottom
R131  100k  [0603-RES]  83.95,49.78 90 bottom
R132  1  [0603-RES]  80.14,52.32 0 bottom
R133  100k  [0603-RES]  114.74,50.74 90 bottom
R134  1  [0603-RES]  114.74,47.24 270 bottom
R135  1K  [0603-RES]  111.57,52.96 180 bottom
R136  4.7K  [0603-RES]  116.33,44.7 90 bottom
R137  4.7K  [0603-RES]  121.41,44.7 90 bottom
R138  10K  [0603-RES]  111.57,48.83 0 bottom
R139  1K  [0603-RES]  118.87,55.18 0 bottom
R140  1K  [0603-RES]  91.57,53.59 180 bottom
R141  100k  [0603-RES]  162.05,45.34 0 bottom
R142  100k  [0603-RES]  150.94,45.66 0 bottom
R143  1K 1%  [0603-RES]  148.72,49.78 90 bottom
R144  1K  [0603-RES]  151.26,49.78 270 bottom
R145  100k  [0603-RES]  146.18,49.78 90 bottom
R146  1  [0603-RES]  142.37,52.32 0 bottom
R147  100k  [0603-RES]  176.97,50.74 90 bottom
R148  1  [0603-RES]  176.97,47.24 270 bottom
R149  1K  [0603-RES]  173.8,52.96 180 bottom
R150  4.7K  [0603-RES]  178.56,44.7 90 bottom
R151  4.7K  [0603-RES]  183.64,44.7 90 bottom
R152  10K  [0603-RES]  173.8,48.83 0 bottom
R153  1K  [0603-RES]  181.1,55.18 0 bottom
R154  1K  [0603-RES]  153.8,53.59 180 bottom
R155  100k  [0603-RES]  224.28,45.34 0 bottom
R156  100k  [0603-RES]  213.17,45.66 0 bottom
R157  1K 1%  [0603-RES]  210.95,49.78 90 bottom
R158  1K  [0603-RES]  213.49,49.78 270 bottom
R159  100k  [0603-RES]  208.41,49.78 90 bottom
R160  1  [0603-RES]  204.6,52.32 0 bottom
R161  100k  [0603-RES]  239.2,50.74 90 bottom
R162  1  [0603-RES]  239.2,47.24 270 bottom
R163  1K  [0603-RES]  236.03,52.96 180 bottom
R164  4.7K  [0603-RES]  240.79,44.7 90 bottom
R165  4.7K  [0603-RES]  245.87,44.7 90 bottom
R166  10K  [0603-RES]  236.03,48.83 0 bottom
R167  1K  [0603-RES]  243.33,55.18 0 bottom
R168  1K  [0603-RES]  216.03,53.59 180 bottom
R169  100k  [0603-RES]  37.59,62.36 0 bottom
R170  100k  [0603-RES]  26.48,62.67 0 bottom
R171  1K 1%  [0603-RES]  24.26,66.8 90 bottom
R172  1K  [0603-RES]  26.8,66.8 270 bottom
R173  100k  [0603-RES]  21.72,66.8 90 bottom
R174  1  [0603-RES]  17.91,69.34 0 bottom
R175  100k  [0603-RES]  52.51,67.75 90 bottom
R176  1  [0603-RES]  52.51,64.26 270 bottom
R177  1K  [0603-RES]  49.34,69.98 180 bottom
R178  4.7K  [0603-RES]  54.1,61.72 90 bottom
R179  4.7K  [0603-RES]  59.18,61.72 90 bottom
R180  10K  [0603-RES]  49.34,65.85 0 bottom
R181  1K  [0603-RES]  56.64,72.2 0 bottom
R182  1K  [0603-RES]  29.34,70.61 180 bottom
R183  100k  [0603-RES]  99.82,62.36 0 bottom
R184  100k  [0603-RES]  88.71,62.67 0 bottom
R185  1K 1%  [0603-RES]  86.49,66.8 90 bottom
R186  1K  [0603-RES]  89.03,66.8 270 bottom
R187  100k  [0603-RES]  83.95,66.8 90 bottom
R188  1  [0603-RES]  80.14,69.34 0 bottom
R189  100k  [0603-RES]  114.74,67.75 90 bottom
R190  1  [0603-RES]  114.74,64.26 270 bottom
R191  1K  [0603-RES]  111.57,69.98 180 bottom
R192  4.7K  [0603-RES]  116.33,61.72 90 bottom
R193  4.7K  [0603-RES]  121.41,61.72 90 bottom
R194  10K  [0603-RES]  111.57,65.85 0 bottom
R195  1K  [0603-RES]  118.87,72.2 0 bottom
R196  1K  [0603-RES]  91.57,70.61 180 bottom
R197  100k  [0603-RES]  162.05,62.36 0 bottom
R198  100k  [0603-RES]  150.94,62.67 0 bottom
R199  1K 1%  [0603-RES]  148.72,66.8 90 bottom
R200  1K  [0603-RES]  151.26,66.8 270 bottom
R201  100k  [0603-RES]  146.18,66.8 90 bottom
R202  1  [0603-RES]  142.37,69.34 0 bottom
R203  100k  [0603-RES]  176.97,67.75 90 bottom
R204  1  [0603-RES]  176.97,64.26 270 bottom
R205  1K  [0603-RES]  173.8,69.98 180 bottom
R206  4.7K  [0603-RES]  178.56,61.72 90 bottom
R207  4.7K  [0603-RES]  183.64,61.72 90 bottom
R208  10K  [0603-RES]  173.8,65.85 0 bottom
R209  1K  [0603-RES]  181.1,72.2 0 bottom
R210  1K  [0603-RES]  153.8,70.61 180 bottom
R211  100k  [0603-RES]  224.28,62.36 0 bottom
R212  100k  [0603-RES]  213.17,62.67 0 bottom
R213  1K 1%  [0603-RES]  210.95,66.8 90 bottom
R214  1K  [0603-RES]  213.49,66.8 270 bottom
R215  100k  [0603-RES]  208.41,66.8 90 bottom
R216  1  [0603-RES]  204.6,69.34 0 bottom
R217  100k  [0603-RES]  239.2,67.75 90 bottom
R218  1  [0603-RES]  239.2,64.26 270 bottom
R219  1K  [0603-RES]  236.03,69.98 180 bottom
R220  4.7K  [0603-RES]  240.79,61.72 90 bottom
R221  4.7K  [0603-RES]  245.87,61.72 90 bottom
R222  10K  [0603-RES]  236.03,65.85 0 bottom
R223  1K  [0603-RES]  243.33,72.2 0 bottom
R224  1K  [0603-RES]  216.03,70.61 180 bottom
SJ1  JUMPER-PAD-3-NC_BY_PASTE  [PAD-JUMPER-3-NC_BY_PASTE_YES_SILK_FULL_BOX]  56.64,11.3 0 bottom
SJ2  JUMPER-PAD-2-NOYES_SILK  [PAD-JUMPER-2-NO_YES_SILK]  49.09,16.7 90 bottom
SJ3  JUMPER-PAD-3-NC_BY_PASTE  [PAD-JUMPER-3-NC_BY_PASTE_YES_SILK_FULL_BOX]  118.87,11.3 0 bottom
SJ4  JUMPER-PAD-2-NOYES_SILK  [PAD-JUMPER-2-NO_YES_SILK]  111.32,16.7 90 bottom
SJ5  JUMPER-PAD-3-NC_BY_PASTE  [PAD-JUMPER-3-NC_BY_PASTE_YES_SILK_FULL_BOX]  181.1,11.3 0 bottom
SJ6  JUMPER-PAD-2-NOYES_SILK  [PAD-JUMPER-2-NO_YES_SILK]  173.55,16.7 90 bottom
SJ7  JUMPER-PAD-3-NC_BY_PASTE  [PAD-JUMPER-3-NC_BY_PASTE_YES_SILK_FULL_BOX]  243.33,11.3 0 bottom
SJ8  JUMPER-PAD-2-NOYES_SILK  [PAD-JUMPER-2-NO_YES_SILK]  235.78,16.7 90 bottom
SJ9  JUMPER-PAD-3-NC_BY_PASTE  [PAD-JUMPER-3-NC_BY_PASTE_YES_SILK_FULL_BOX]  56.64,28.32 0 bottom
SJ10  JUMPER-PAD-2-NOYES_SILK  [PAD-JUMPER-2-NO_YES_SILK]  49.09,33.72 90 bottom
SJ11  JUMPER-PAD-3-NC_BY_PASTE  [PAD-JUMPER-3-NC_BY_PASTE_YES_SILK_FULL_BOX]  118.87,28.32 0 bottom
SJ12  JUMPER-PAD-2-NOYES_SILK  [PAD-JUMPER-2-NO_YES_SILK]  111.32,33.72 90 bottom
SJ13  JUMPER-PAD-3-NC_BY_PASTE  [PAD-JUMPER-3-NC_BY_PASTE_YES_SILK_FULL_BOX]  181.1,28.32 0 bottom
SJ14  JUMPER-PAD-2-NOYES_SILK  [PAD-JUMPER-2-NO_YES_SILK]  173.55,33.72 90 bottom
SJ15  JUMPER-PAD-3-NC_BY_PASTE  [PAD-JUMPER-3-NC_BY_PASTE_YES_SILK_FULL_BOX]  243.33,28.32 0 bottom
SJ16  JUMPER-PAD-2-NOYES_SILK  [PAD-JUMPER-2-NO_YES_SILK]  235.78,33.72 90 bottom
SJ17  JUMPER-PAD-3-NC_BY_PASTE  [PAD-JUMPER-3-NC_BY_PASTE_YES_SILK_FULL_BOX]  56.64,45.34 0 bottom
SJ18  JUMPER-PAD-2-NOYES_SILK  [PAD-JUMPER-2-NO_YES_SILK]  49.09,50.74 90 bottom
SJ19  JUMPER-PAD-3-NC_BY_PASTE  [PAD-JUMPER-3-NC_BY_PASTE_YES_SILK_FULL_BOX]  118.87,45.34 0 bottom
SJ20  JUMPER-PAD-2-NOYES_SILK  [PAD-JUMPER-2-NO_YES_SILK]  111.32,50.74 90 bottom
SJ21  JUMPER-PAD-3-NC_BY_PASTE  [PAD-JUMPER-3-NC_BY_PASTE_YES_SILK_FULL_BOX]  181.1,45.34 0 bottom
SJ22  JUMPER-PAD-2-NOYES_SILK  [PAD-JUMPER-2-NO_YES_SILK]  173.55,50.74 90 bottom
SJ23  JUMPER-PAD-3-NC_BY_PASTE  [PAD-JUMPER-3-NC_BY_PASTE_YES_SILK_FULL_BOX]  243.33,45.34 0 bottom
SJ24  JUMPER-PAD-2-NOYES_SILK  [PAD-JUMPER-2-NO_YES_SILK]  235.78,50.74 90 bottom
SJ25  JUMPER-PAD-3-NC_BY_PASTE  [PAD-JUMPER-3-NC_BY_PASTE_YES_SILK_FULL_BOX]  56.64,62.36 0 bottom
SJ26  JUMPER-PAD-2-NOYES_SILK  [PAD-JUMPER-2-NO_YES_SILK]  49.09,67.75 90 bottom
SJ27  JUMPER-PAD-3-NC_BY_PASTE  [PAD-JUMPER-3-NC_BY_PASTE_YES_SILK_FULL_BOX]  118.87,62.36 0 bottom
SJ28  JUMPER-PAD-2-NOYES_SILK  [PAD-JUMPER-2-NO_YES_SILK]  111.32,67.75 90 bottom
SJ29  JUMPER-PAD-3-NC_BY_PASTE  [PAD-JUMPER-3-NC_BY_PASTE_YES_SILK_FULL_BOX]  181.1,62.36 0 bottom
SJ30  JUMPER-PAD-2-NOYES_SILK  [PAD-JUMPER-2-NO_YES_SILK]  173.55,67.75 90 bottom
SJ31  JUMPER-PAD-3-NC_BY_PASTE  [PAD-JUMPER-3-NC_BY_PASTE_YES_SILK_FULL_BOX]  243.33,62.36 0 bottom
SJ32  JUMPER-PAD-2-NOYES_SILK  [PAD-JUMPER-2-NO_YES_SILK]  235.78,67.75 90 bottom
STANDOFF1  STAND-OFF  [STAND-OFF]  11.56,15.11 0 top
STANDOFF2  STAND-OFF  [STAND-OFF]  63.63,15.11 90 top
STANDOFF3  STAND-OFF  [STAND-OFF]  73.79,15.11 0 top
STANDOFF4  STAND-OFF  [STAND-OFF]  125.86,15.11 90 top
STANDOFF5  STAND-OFF  [STAND-OFF]  136.02,15.11 0 top
STANDOFF6  STAND-OFF  [STAND-OFF]  188.09,15.11 90 top
STANDOFF7  STAND-OFF  [STAND-OFF]  198.25,15.11 0 top
STANDOFF8  STAND-OFF  [STAND-OFF]  250.32,15.11 90 top
STANDOFF9  STAND-OFF  [STAND-OFF]  11.56,32.13 0 top
STANDOFF10  STAND-OFF  [STAND-OFF]  63.63,32.13 90 top
STANDOFF11  STAND-OFF  [STAND-OFF]  73.79,32.13 0 top
STANDOFF12  STAND-OFF  [STAND-OFF]  125.86,32.13 90 top
STANDOFF13  STAND-OFF  [STAND-OFF]  136.02,32.13 0 top
STANDOFF14  STAND-OFF  [STAND-OFF]  188.09,32.13 90 top
STANDOFF15  STAND-OFF  [STAND-OFF]  198.25,32.13 0 top
STANDOFF16  STAND-OFF  [STAND-OFF]  250.32,32.13 90 top
STANDOFF17  STAND-OFF  [STAND-OFF]  11.56,49.15 0 top
STANDOFF18  STAND-OFF  [STAND-OFF]  63.63,49.15 90 top
STANDOFF19  STAND-OFF  [STAND-OFF]  73.79,49.15 0 top
STANDOFF20  STAND-OFF  [STAND-OFF]  125.86,49.15 90 top
STANDOFF21  STAND-OFF  [STAND-OFF]  136.02,49.15 0 top
STANDOFF22  STAND-OFF  [STAND-OFF]  188.09,49.15 90 top
STANDOFF23  STAND-OFF  [STAND-OFF]  198.25,49.15 0 top
STANDOFF24  STAND-OFF  [STAND-OFF]  250.32,49.15 90 top
STANDOFF25  STAND-OFF  [STAND-OFF]  11.56,66.17 0 top
STANDOFF26  STAND-OFF  [STAND-OFF]  63.63,66.17 90 top
STANDOFF27  STAND-OFF  [STAND-OFF]  73.79,66.17 0 top
STANDOFF28  STAND-OFF  [STAND-OFF]  125.86,66.17 90 top
STANDOFF29  STAND-OFF  [STAND-OFF]  136.02,66.17 0 top
STANDOFF30  STAND-OFF  [STAND-OFF]  188.09,66.17 90 top
STANDOFF31  STAND-OFF  [STAND-OFF]  198.25,66.17 0 top
STANDOFF32  STAND-OFF  [STAND-OFF]  250.32,66.17 90 top
TP1  TEST-POINT3X4  [PAD.03X.04]  32.19,22.42 0 bottom
TP2  TEST-POINT3X4  [PAD.03X.04]  34.73,22.42 90 bottom
TP3  TEST-POINT3X4  [PAD.03X.04]  37.27,22.42 0 bottom
TP4  TEST-POINT3X4  [PAD.03X.04]  39.81,22.42 0 bottom
TP5  TEST-POINT3X4  [PAD.03X.04]  42.35,22.42 0 bottom
TP6  TEST-POINT3X4  [PAD.03X.04]  96.96,22.42 90 bottom
TP7  TEST-POINT3X4  [PAD.03X.04]  99.5,22.42 0 bottom
TP8  TEST-POINT3X4  [PAD.03X.04]  94.42,22.42 0 bottom
TP9  TEST-POINT3X4  [PAD.03X.04]  104.58,22.42 0 bottom
TP10  TEST-POINT3X4  [PAD.03X.04]  102.04,22.42 0 bottom
TP11  TEST-POINT3X4  [PAD.03X.04]  159.19,22.42 90 bottom
TP12  TEST-POINT3X4  [PAD.03X.04]  161.73,22.42 0 bottom
TP13  TEST-POINT3X4  [PAD.03X.04]  156.65,22.42 0 bottom
TP14  TEST-POINT3X4  [PAD.03X.04]  166.81,22.42 0 bottom
TP15  TEST-POINT3X4  [PAD.03X.04]  164.27,22.42 0 bottom
TP16  TEST-POINT3X4  [PAD.03X.04]  221.42,22.42 90 bottom
TP17  TEST-POINT3X4  [PAD.03X.04]  223.96,22.42 0 bottom
TP18  TEST-POINT3X4  [PAD.03X.04]  218.88,22.42 0 bottom
TP19  TEST-POINT3X4  [PAD.03X.04]  229.04,22.42 0 bottom
TP20  TEST-POINT3X4  [PAD.03X.04]  226.5,22.42 0 bottom
TP21  TEST-POINT3X4  [PAD.03X.04]  34.73,39.43 90 bottom
TP22  TEST-POINT3X4  [PAD.03X.04]  37.27,39.43 0 bottom
TP23  TEST-POINT3X4  [PAD.03X.04]  32.19,39.43 0 bottom
TP24  TEST-POINT3X4  [PAD.03X.04]  42.35,39.43 0 bottom
TP25  TEST-POINT3X4  [PAD.03X.04]  39.81,39.43 0 bottom
TP26  TEST-POINT3X4  [PAD.03X.04]  96.96,39.43 90 bottom
TP27  TEST-POINT3X4  [PAD.03X.04]  99.5,39.43 0 bottom
TP28  TEST-POINT3X4  [PAD.03X.04]  94.42,39.43 0 bottom
TP29  TEST-POINT3X4  [PAD.03X.04]  104.58,39.43 0 bottom
TP30  TEST-POINT3X4  [PAD.03X.04]  102.04,39.43 0 bottom
TP31  TEST-POINT3X4  [PAD.03X.04]  159.19,39.43 90 bottom
TP32  TEST-POINT3X4  [PAD.03X.04]  161.73,39.43 0 bottom
TP33  TEST-POINT3X4  [PAD.03X.04]  156.65,39.43 0 bottom
TP34  TEST-POINT3X4  [PAD.03X.04]  166.81,39.43 0 bottom
TP35  TEST-POINT3X4  [PAD.03X.04]  164.27,39.43 0 bottom
TP36  TEST-POINT3X4  [PAD.03X.04]  221.42,39.43 90 bottom
TP37  TEST-POINT3X4  [PAD.03X.04]  223.96,39.43 0 bottom
TP38  TEST-POINT3X4  [PAD.03X.04]  218.88,39.43 0 bottom
TP39  TEST-POINT3X4  [PAD.03X.04]  229.04,39.43 0 bottom
TP40  TEST-POINT3X4  [PAD.03X.04]  226.5,39.43 0 bottom
TP41  TEST-POINT3X4  [PAD.03X.04]  34.73,56.45 90 bottom
TP42  TEST-POINT3X4  [PAD.03X.04]  37.27,56.45 0 bottom
TP43  TEST-POINT3X4  [PAD.03X.04]  32.19,56.45 0 bottom
TP44  TEST-POINT3X4  [PAD.03X.04]  42.35,56.45 0 bottom
TP45  TEST-POINT3X4  [PAD.03X.04]  39.81,56.45 0 bottom
TP46  TEST-POINT3X4  [PAD.03X.04]  96.96,56.45 90 bottom
TP47  TEST-POINT3X4  [PAD.03X.04]  99.5,56.45 0 bottom
TP48  TEST-POINT3X4  [PAD.03X.04]  94.42,56.45 0 bottom
TP49  TEST-POINT3X4  [PAD.03X.04]  104.58,56.45 0 bottom
TP50  TEST-POINT3X4  [PAD.03X.04]  102.04,56.45 0 bottom
TP51  TEST-POINT3X4  [PAD.03X.04]  159.19,56.45 90 bottom
TP52  TEST-POINT3X4  [PAD.03X.04]  161.73,56.45 0 bottom
TP53  TEST-POINT3X4  [PAD.03X.04]  156.65,56.45 0 bottom
TP54  TEST-POINT3X4  [PAD.03X.04]  166.81,56.45 0 bottom
TP55  TEST-POINT3X4  [PAD.03X.04]  164.27,56.45 0 bottom
TP56  TEST-POINT3X4  [PAD.03X.04]  221.42,56.45 90 bottom
TP57  TEST-POINT3X4  [PAD.03X.04]  223.96,56.45 0 bottom
TP58  TEST-POINT3X4  [PAD.03X.04]  218.88,56.45 0 bottom
TP59  TEST-POINT3X4  [PAD.03X.04]  229.04,56.45 0 bottom
TP60  TEST-POINT3X4  [PAD.03X.04]  226.5,56.45 0 bottom
TP61  TEST-POINT3X4  [PAD.03X.04]  34.73,73.47 90 bottom
TP62  TEST-POINT3X4  [PAD.03X.04]  37.27,73.47 0 bottom
TP63  TEST-POINT3X4  [PAD.03X.04]  32.19,73.47 0 bottom
TP64  TEST-POINT3X4  [PAD.03X.04]  42.35,73.47 0 bottom
TP65  TEST-POINT3X4  [PAD.03X.04]  39.81,73.47 0 bottom
TP66  TEST-POINT3X4  [PAD.03X.04]  96.96,73.47 90 bottom
TP67  TEST-POINT3X4  [PAD.03X.04]  99.5,73.47 0 bottom
TP68  TEST-POINT3X4  [PAD.03X.04]  94.42,73.47 0 bottom
TP69  TEST-POINT3X4  [PAD.03X.04]  104.58,73.47 0 bottom
TP70  TEST-POINT3X4  [PAD.03X.04]  102.04,73.47 0 bottom
TP71  TEST-POINT3X4  [PAD.03X.04]  159.19,73.47 90 bottom
TP72  TEST-POINT3X4  [PAD.03X.04]  161.73,73.47 0 bottom
TP73  TEST-POINT3X4  [PAD.03X.04]  156.65,73.47 0 bottom
TP74  TEST-POINT3X4  [PAD.03X.04]  166.81,73.47 0 bottom
TP75  TEST-POINT3X4  [PAD.03X.04]  164.27,73.47 0 bottom
TP76  TEST-POINT3X4  [PAD.03X.04]  221.42,73.47 90 bottom
TP77  TEST-POINT3X4  [PAD.03X.04]  223.96,73.47 0 bottom
TP78  TEST-POINT3X4  [PAD.03X.04]  218.88,73.47 0 bottom
TP79  TEST-POINT3X4  [PAD.03X.04]  229.04,73.47 0 bottom
TP80  TEST-POINT3X4  [PAD.03X.04]  226.5,73.47 0 bottom
U1  PIC16F1823-14PINTSSOP  [TSSOP14]  37.59,15.11 90 bottom
U2  MCP6021T-E/OT  [SOT23-5]  29.34,15.75 180 bottom
U3  DMC2700UDM  [SOT26]  17.91,15.75 90 bottom
U4  DMC2700UDM  [SOT26]  56.64,15.11 270 bottom
U5  TSSP57038  [TSOP572]  37.59,15.11 180 top
U6  PIC16F1823-14PINTSSOP  [TSSOP14]  99.82,15.11 90 bottom
U7  MCP6021T-E/OT  [SOT23-5]  91.57,15.75 180 bottom
U8  DMC2700UDM  [SOT26]  80.14,15.75 90 bottom
U9  DMC2700UDM  [SOT26]  118.87,15.11 270 bottom
U10  TSSP57038  [TSOP572]  99.82,15.11 180 top
U11  PIC16F1823-14PINTSSOP  [TSSOP14]  162.05,15.11 90 bottom
U12  MCP6021T-E/OT  [SOT23-5]  153.8,15.75 180 bottom
U13  DMC2700UDM  [SOT26]  142.37,15.75 90 bottom
U14  DMC2700UDM  [SOT26]  181.1,15.11 270 bottom
U15  TSSP57038  [TSOP572]  162.05,15.11 180 top
U16  PIC16F1823-14PINTSSOP  [TSSOP14]  224.28,15.11 90 bottom
U17  MCP6021T-E/OT  [SOT23-5]  216.03,15.75 180 bottom
U18  DMC2700UDM  [SOT26]  204.6,15.75 90 bottom
U19  DMC2700UDM  [SOT26]  243.33,15.11 270 bottom
U20  TSSP57038  [TSOP572]  224.28,15.11 180 top
U21  PIC16F1823-14PINTSSOP  [TSSOP14]  37.59,32.13 90 bottom
U22  MCP6021T-E/OT  [SOT23-5]  29.34,32.77 180 bottom
U23  DMC2700UDM  [SOT26]  17.91,32.77 90 bottom
U24  DMC2700UDM  [SOT26]  56.64,32.13 270 bottom
U25  TSSP57038  [TSOP572]  37.59,32.13 180 top
U26  PIC16F1823-14PINTSSOP  [TSSOP14]  99.82,32.13 90 bottom
U27  MCP6021T-E/OT  [SOT23-5]  91.57,32.77 180 bottom
U28  DMC2700UDM  [SOT26]  80.14,32.77 90 bottom
U29  DMC2700UDM  [SOT26]  118.87,32.13 270 bottom
U30  TSSP57038  [TSOP572]  99.82,32.13 180 top
U31  PIC16F1823-14PINTSSOP  [TSSOP14]  162.05,32.13 90 bottom
U32  MCP6021T-E/OT  [SOT23-5]  153.8,32.77 180 bottom
U33  DMC2700UDM  [SOT26]  142.37,32.77 90 bottom
U34  DMC2700UDM  [SOT26]  181.1,32.13 270 bottom
U35  TSSP57038  [TSOP572]  162.05,32.13 180 top
U36  PIC16F1823-14PINTSSOP  [TSSOP14]  224.28,32.13 90 bottom
U37  MCP6021T-E/OT  [SOT23-5]  216.03,32.77 180 bottom
U38  DMC2700UDM  [SOT26]  204.6,32.77 90 bottom
U39  DMC2700UDM  [SOT26]  243.33,32.13 270 bottom
U40  TSSP57038  [TSOP572]  224.28,32.13 180 top
U41  PIC16F1823-14PINTSSOP  [TSSOP14]  37.59,49.15 90 bottom
U42  MCP6021T-E/OT  [SOT23-5]  29.34,49.78 180 bottom
U43  DMC2700UDM  [SOT26]  17.91,49.78 90 bottom
U44  DMC2700UDM  [SOT26]  56.64,49.15 270 bottom
U45  TSSP57038  [TSOP572]  37.59,49.15 180 top
U46  PIC16F1823-14PINTSSOP  [TSSOP14]  99.82,49.15 90 bottom
U47  MCP6021T-E/OT  [SOT23-5]  91.57,49.78 180 bottom
U48  DMC2700UDM  [SOT26]  80.14,49.78 90 bottom
U49  DMC2700UDM  [SOT26]  118.87,49.15 270 bottom
U50  TSSP57038  [TSOP572]  99.82,49.15 180 top
U51  PIC16F1823-14PINTSSOP  [TSSOP14]  162.05,49.15 90 bottom
U52  MCP6021T-E/OT  [SOT23-5]  153.8,49.78 180 bottom
U53  DMC2700UDM  [SOT26]  142.37,49.78 90 bottom
U54  DMC2700UDM  [SOT26]  181.1,49.15 270 bottom
U55  TSSP57038  [TSOP572]  162.05,49.15 180 top
U56  PIC16F1823-14PINTSSOP  [TSSOP14]  224.28,49.15 90 bottom
U57  MCP6021T-E/OT  [SOT23-5]  216.03,49.78 180 bottom
U58  DMC2700UDM  [SOT26]  204.6,49.78 90 bottom
U59  DMC2700UDM  [SOT26]  243.33,49.15 270 bottom
U60  TSSP57038  [TSOP572]  224.28,49.15 180 top
U61  PIC16F1823-14PINTSSOP  [TSSOP14]  37.59,66.17 90 bottom
U62  MCP6021T-E/OT  [SOT23-5]  29.34,66.8 180 bottom
U63  DMC2700UDM  [SOT26]  17.91,66.8 90 bottom
U64  DMC2700UDM  [SOT26]  56.64,66.17 270 bottom
U65  TSSP57038  [TSOP572]  37.59,66.17 180 top
U66  PIC16F1823-14PINTSSOP  [TSSOP14]  99.82,66.17 90 bottom
U67  MCP6021T-E/OT  [SOT23-5]  91.57,66.8 180 bottom
U68  DMC2700UDM  [SOT26]  80.14,66.8 90 bottom
U69  DMC2700UDM  [SOT26]  118.87,66.17 270 bottom
U70  TSSP57038  [TSOP572]  99.82,66.17 180 top
U71  PIC16F1823-14PINTSSOP  [TSSOP14]  162.05,66.17 90 bottom
U72  MCP6021T-E/OT  [SOT23-5]  153.8,66.8 180 bottom
U73  DMC2700UDM  [SOT26]  142.37,66.8 90 bottom
U74  DMC2700UDM  [SOT26]  181.1,66.17 270 bottom
U75  TSSP57038  [TSOP572]  162.05,66.17 180 top
U76  PIC16F1823-14PINTSSOP  [TSSOP14]  224.28,66.17 90 bottom
U77  MCP6021T-E/OT  [SOT23-5]  216.03,66.8 180 bottom
U78  DMC2700UDM  [SOT26]  204.6,66.8 90 bottom
U79  DMC2700UDM  [SOT26]  243.33,66.17 270 bottom
U80  TSSP57038  [TSOP572]  224.28,66.17 180 top
U$1  SFE_LOGO_NAME_FLAME.1_INCH  [SFE_LOGO_NAME_FLAME_.1]  103.1,12.79 0 top
U$2  GESTURESENSE_LOGOSTEXT  [GESTURESENSE_TEXT]  86.07,11.18 0 top
U$3  SFE_LOGO_NAME_FLAME.1_INCH  [SFE_LOGO_NAME_FLAME_.1]  165.33,12.79 0 top
U$4  GESTURESENSE_LOGOSTEXT  [GESTURESENSE_TEXT]  148.3,11.18 0 top
U$5  SFE_LOGO_NAME_FLAME.1_INCH  [SFE_LOGO_NAME_FLAME_.1]  40.87,12.79 0 top
U$6  GESTURESENSE_LOGOSTEXT  [GESTURESENSE_TEXT]  23.84,11.18 0 top
U$7  SFE_LOGO_NAME_FLAME.1_INCH  [SFE_LOGO_NAME_FLAME_.1]  227.56,12.79 0 top
U$8  GESTURESENSE_LOGOSTEXT  [GESTURESENSE_TEXT]  210.53,11.18 0 top
U$9  SFE_LOGO_NAME_FLAME.1_INCH  [SFE_LOGO_NAME_FLAME_.1]  40.87,29.81 0 top
U$10  GESTURESENSE_LOGOSTEXT  [GESTURESENSE_TEXT]  23.84,28.19 0 top
U$11  SFE_LOGO_NAME_FLAME.1_INCH  [SFE_LOGO_NAME_FLAME_.1]  103.1,29.81 0 top
U$12  GESTURESENSE_LOGOSTEXT  [GESTURESENSE_TEXT]  86.07,28.19 0 top
U$13  SFE_LOGO_NAME_FLAME.1_INCH  [SFE_LOGO_NAME_FLAME_.1]  165.33,29.81 0 top
U$14  GESTURESENSE_LOGOSTEXT  [GESTURESENSE_TEXT]  148.3,28.19 0 top
U$15  SFE_LOGO_NAME_FLAME.1_INCH  [SFE_LOGO_NAME_FLAME_.1]  227.56,29.81 0 top
U$16  GESTURESENSE_LOGOSTEXT  [GESTURESENSE_TEXT]  210.53,28.19 0 top
U$17  SFE_LOGO_NAME_FLAME.1_INCH  [SFE_LOGO_NAME_FLAME_.1]  40.87,46.82 0 top
U$18  GESTURESENSE_LOGOSTEXT  [GESTURESENSE_TEXT]  23.84,45.21 0 top
U$19  SFE_LOGO_NAME_FLAME.1_INCH  [SFE_LOGO_NAME_FLAME_.1]  103.1,46.82 0 top
U$20  GESTURESENSE_LOGOSTEXT  [GESTURESENSE_TEXT]  86.07,45.21 0 top
U$21  SFE_LOGO_NAME_FLAME.1_INCH  [SFE_LOGO_NAME_FLAME_.1]  165.33,46.82 0 top
U$22  GESTURESENSE_LOGOSTEXT  [GESTURESENSE_TEXT]  148.3,45.21 0 top
U$23  SFE_LOGO_NAME_FLAME.1_INCH  [SFE_LOGO_NAME_FLAME_.1]  227.56,46.82 0 top
U$24  GESTURESENSE_LOGOSTEXT  [GESTURESENSE_TEXT]  210.53,45.21 0 top
U$25  SFE_LOGO_NAME_FLAME.1_INCH  [SFE_LOGO_NAME_FLAME_.1]  40.87,63.84 0 top
U$26  GESTURESENSE_LOGOSTEXT  [GESTURESENSE_TEXT]  23.84,62.23 0 top
U$27  SFE_LOGO_NAME_FLAME.1_INCH  [SFE_LOGO_NAME_FLAME_.1]  103.1,63.84 0 top
U$28  GESTURESENSE_LOGOSTEXT  [GESTURESENSE_TEXT]  86.07,62.23 0 top
U$29  SFE_LOGO_NAME_FLAME.1_INCH  [SFE_LOGO_NAME_FLAME_.1]  165.33,63.84 0 top
U$30  GESTURESENSE_LOGOSTEXT  [GESTURESENSE_TEXT]  148.3,62.23 0 top
U$31  SFE_LOGO_NAME_FLAME.1_INCH  [SFE_LOGO_NAME_FLAME_.1]  227.56,63.84 0 top
U$32  GESTURESENSE_LOGOSTEXT  [GESTURESENSE_TEXT]  210.53,62.23 0 top

## Library data of the parts
C1-C3 C5 C8 C9 C11 C14-C16 C18 C21-C23 C25 C28-C30 C32 C35-C37 C39 C42-C44 C46 C49-C51 C53 C56-C58 C60 C63-C65 C67 C70-C72 C74 C77-C79 C81 C84-C86 C88 C91-C93 C95 C98-C100 C102 C105-C107 C109 C112 = SparkFun-Capacitors; PROD_ID: CAP-00810
C4 C6 C10 C12 C17 C19 C24 C26 C31 C33 C38 C40 C45 C47 C52 C54 C59 C61 C66 C68 C73 C75 C80 C82 C87 C89 C94 C96 C101 C103 C108 C110 = SparkFun-Capacitors; PROD_ID: CAP-00867
C7 C13 C20 C27 C34 C41 C48 C55 C62 C69 C76 C83 C90 C97 C104 C111 = SparkFun-Capacitors; PROD_ID: CAP-08280
D1-D32 = SparkFun-LED; PROD_ID: DIO-11994
E$1 E$2 = SparkFun-Retired
E$3 E$4 E$7 E$8 FID1-FID64 LOGO1-LOGO16 U$1-U$32 = SparkFun-Aesthetics
JP1 JP3 JP5 JP7 JP9 JP11 JP13 JP15 JP17 JP19 JP21 JP23 JP25 JP27 JP29 JP31 = SparkFun-Connectors; PROD_ID: CONN-08437
JP2 JP4 JP6 JP8 JP10 JP12 JP14 JP16 JP18 JP20 JP22 JP24 JP26 JP28 JP30 JP32 = SparkFun-Connectors
Q1 Q3 Q5 Q7 Q9 Q11 Q13 Q15 Q17 Q19 Q21 Q23 Q25 Q27 Q29 Q31 = SparkFun-DiscreteSemi; PROD_ID: TRANS-08049
Q2 Q4 Q6 Q8 Q10 Q12 Q14 Q16 Q18 Q20 Q22 Q24 Q26 Q28 Q30 Q32 = SparkFun-DiscreteSemi; PROD_ID: TRANS-11151
R1 R2 R5 R7 R15 R16 R19 R21 R29 R30 R33 R35 R43 R44 R47 R49 R57 R58 R61 R63 R71 R72 R75 R77 R85 R86 R89 R91 R99 R100 R103 R105 R113 R114 R117 R119 R127 R128 R131 R133 R141 R142 R145 R147 R155 R156 R159 R161 R169 R170 R173 R175 R183 R184 R187 R189 R197 R198 R201 R203 R211 R212 R215 R217 = SparkFun-Resistors; PROD_ID: RES-07828
R3 R4 R9 R13 R14 R17 R18 R23 R27 R28 R31 R32 R37 R41 R42 R45 R46 R51 R55 R56 R59 R60 R65 R69 R70 R73 R74 R79 R83 R84 R87 R88 R93 R97 R98 R101 R102 R107 R111 R112 R115 R116 R121 R125 R126 R129 R130 R135 R139 R140 R143 R144 R149 R153 R154 R157 R158 R163 R167 R168 R171 R172 R177 R181 R182 R185 R186 R191 R195 R196 R199 R200 R205 R209 R210 R213 R214 R219 R223 R224 = SparkFun-Resistors; PROD_ID: RES-07856
R6 R8 R20 R22 R34 R36 R48 R50 R62 R64 R76 R78 R90 R92 R104 R106 R118 R120 R132 R134 R146 R148 R160 R162 R174 R176 R188 R190 R202 R204 R216 R218 = SparkFun-Resistors; PROD_ID: RES-08269
R10 R11 R24 R25 R38 R39 R52 R53 R66 R67 R80 R81 R94 R95 R108 R109 R122 R123 R136 R137 R150 R151 R164 R165 R178 R179 R192 R193 R206 R207 R220 R221 = SparkFun-Resistors; PROD_ID: RES-07857
R12 R26 R40 R54 R68 R82 R96 R110 R124 R138 R152 R166 R180 R194 R208 R222 = SparkFun-Resistors; PROD_ID: RES-00824
SJ1-SJ32 TP1-TP80 = SparkFun-Passives
STANDOFF1-STANDOFF32 = SparkFun-Electromechanical
U1 U6 U11 U16 U21 U26 U31 U36 U41 U46 U51 U56 U61 U66 U71 U76 = SparkFun-DigitalIC; PROD_ID: IC-11992
U2 U7 U12 U17 U22 U27 U32 U37 U42 U47 U52 U57 U62 U67 U72 U77 = SparkFun-AnalogIC; PROD_ID: IC-12504
U3 U4 U8 U9 U13 U14 U18 U19 U23 U24 U28 U29 U33 U34 U38 U39 U43 U44 U48 U49 U53 U54 U58 U59 U63 U64 U68 U69 U73 U74 U78 U79 = SparkFun-DiscreteSemi; PROD_ID: TRANS-11993
U5 U10 U15 U20 U25 U30 U35 U40 U45 U50 U55 U60 U65 U70 U75 U80 = SparkFun-Sensors; PROD_ID: PROD-13609